# Altium PCB bridge.PcbDoc
Units mil, origin at the board's own origin, x right, y up, seen from the top; angles counter-clockwise.
Board outline 1765 x 1565 mil, 2 copper layers (Top Layer, Bottom Layer); 8 components, 56 nets, 101 pads, 16 vias.
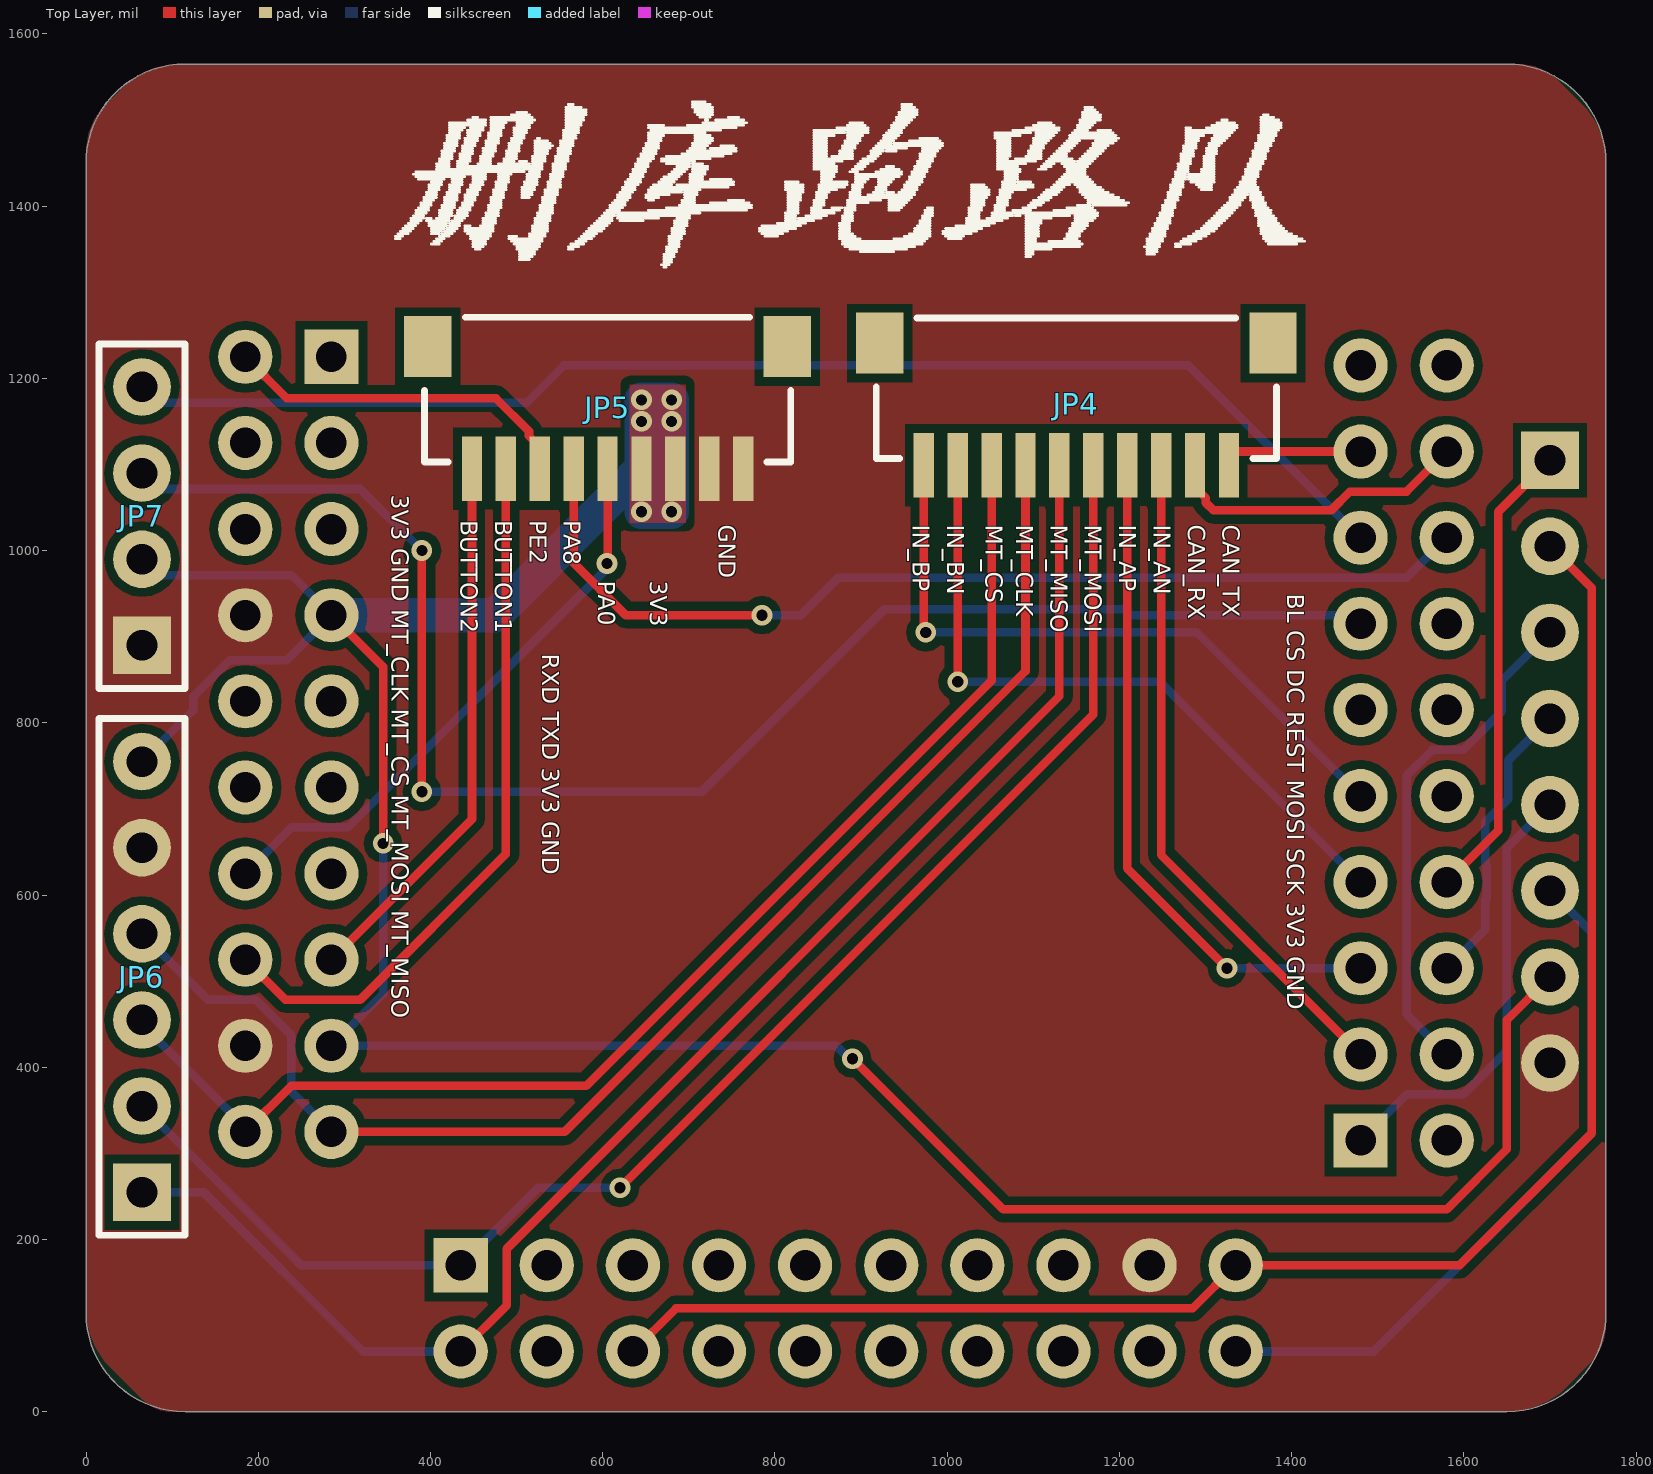
[diagram p0: Top Layer view]
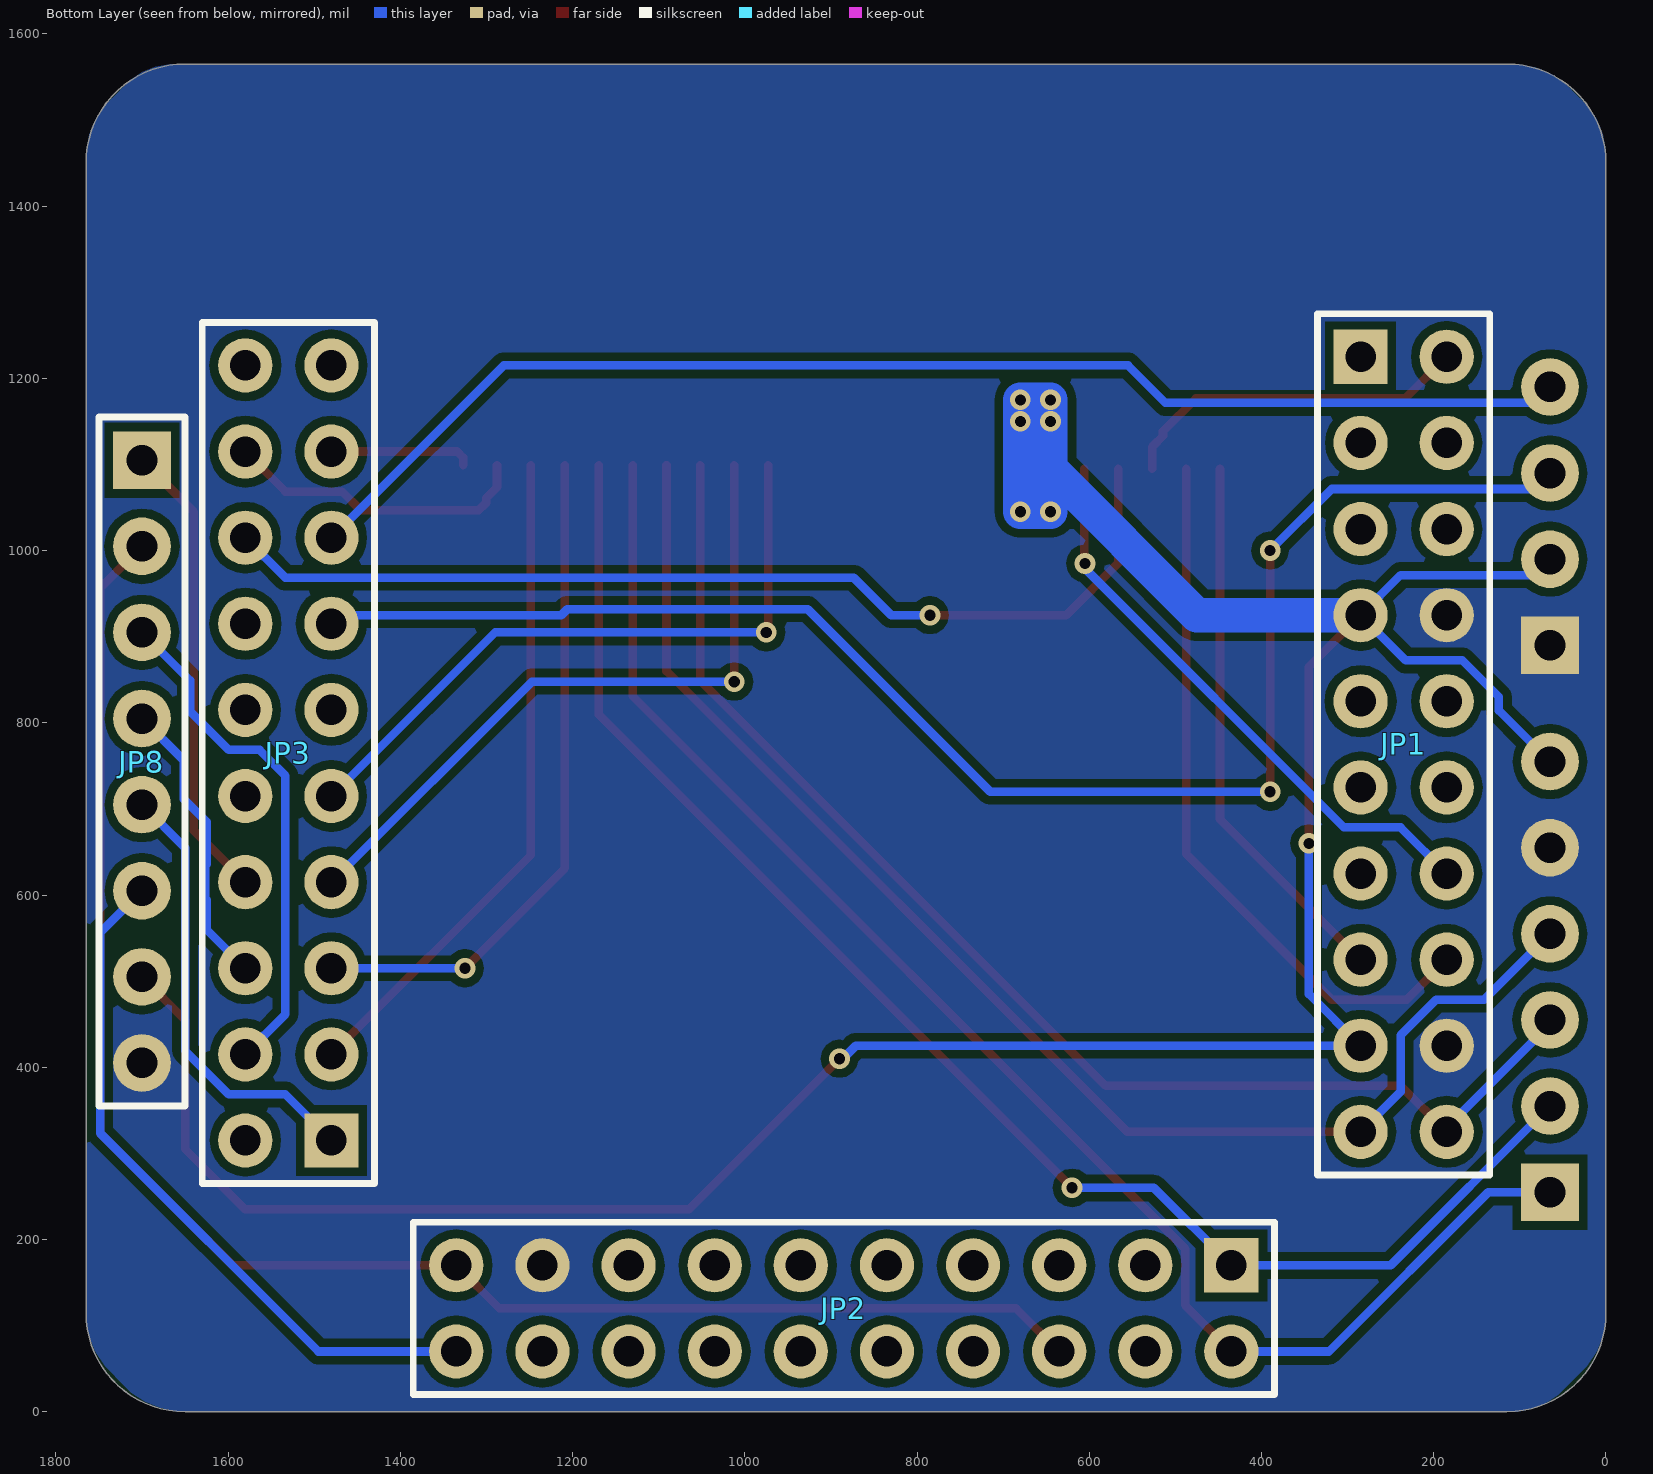
[diagram p1: Bottom Layer view, seen from below]

## Layer stack, top to bottom
Top Solder: solder mask 0.4, Solder Resist, Dk 3.5
Top Layer: signal copper 1.4
Dielectric 1: dielectric 12.6, FR-4, Dk 4.8
Bottom Layer: signal copper 1.4
Bottom Solder: solder mask 0.4, Solder Resist, Dk 3.5

## Board outline
115,0 cw(c115,115) 0,115 0,1450 cw(c115,1450) 115,1565 1650,1565 cw(c1650,1450) 1765,1450 1765,115 cw(c1650,115) 1650,0

## Design rules (kind name [scope] priority, off if disabled: settings)
Clearance [All] p1: gap=10 ignorepadtopadclearanceinfootprint=FALSE except(0: Arc-Hole Track-Hole SMDPad-Hole THPad-Hole Via-Hole Fill-Hole Poly-Hole Region-Hole Text-Hole)
PolygonConnect PolygonConnect_5 [All vs IsNamedPolygon('Bottom Layer-GND')] p1: connectstyle=Direct reliefconductorwidth=10 reliefentries=4 polygonreliefangle="90 Angle" airgapwidth=10
PolygonConnect PolygonConnect_4 [All vs IsNamedPolygon('Top Layer-GND')] p2: connectstyle=Direct reliefconductorwidth=10 reliefentries=4 polygonreliefangle="90 Angle" airgapwidth=10
PolygonConnect PolygonConnect_3 [All vs IsNamedPolygon('Top Layer-GND')] p3: connectstyle=Direct reliefconductorwidth=10 reliefentries=4 polygonreliefangle="90 Angle" airgapwidth=10
PolygonConnect PolygonConnect_2 [All vs IsNamedPolygon('Bottom Layer-3V3')] p4: connectstyle=Direct reliefconductorwidth=10 reliefentries=4 polygonreliefangle="90 Angle" airgapwidth=10
PolygonConnect PolygonConnect_1 [All vs IsNamedPolygon('Top Layer-3V3')] p5: connectstyle=Direct reliefconductorwidth=10 reliefentries=4 polygonreliefangle="90 Angle" airgapwidth=10
PolygonConnect [All] p6: connectstyle=Relief reliefconductorwidth=10 reliefentries=4 polygonreliefangle="90 Angle" airgapwidth=10
RoutingVias [All] p1: holewidth=28 width=50 viastyle="Through Hole" minholewidth=28 minwidth=50 maxholewidth=28 maxwidth=50
SolderMaskExpansion [All] p1: expansion=4
Width [All] p1: maxlimit=100 minlimit=10 preferedwidth=10
30 further rules are at their usual default settings.

## Components (designator, comment, footprint, x,y, rotation, side; value= is the part's Value field where it differs from the comment)
JP1 "Header 2X10" HDR2.54-LI-2x10P 235,775 r270 bottom
JP2 "Header 2X10" HDR2.54-LI-2x10P 885,120 r0 bottom
JP3 "Header 2X10" HDR2.54-LI-2x10P 1530,765 r90 bottom
JP4 "CON-10P" SH1.0-WT-10P 1150,1170 r180 top
JP5 "CON-9P" SH1.0-WT-9P 605.59,1165.9 r180 top
JP6 "HDR-1X6" HDR2.54-LI-6P 65,505 r90 top
JP7 "HDR-1X4" HDR2.54-LI-4P 65,1040 r90 top
JP8 "HDR-1X8" HDR2.54-M-LI-8P 1700,755 r270 bottom

## Footprints (in the part's own frame and the unit in brackets; to place one, negate y for a bottom-side part, rotate by r counter-clockwise, add the part's x,y. Pads: shape width x height; smd on the part's side, far side on the other; paste and mask are expansions set on the pad)
HDR2.54-LI-2x10P [mm] "双排排针，10x2脚"
  rect 1.6x1.6 hole 0.9: 1(-11.43,-1.27)
  round 1.6 hole 0.9: 2(-11.43,1.27) 3(-8.89,-1.27) 4(-8.89,1.27) 5(-6.35,-1.27) 6(-6.35,1.27) 7(-3.81,-1.27) 8(-3.81,1.27) 9(-1.27,-1.27) 10(-1.27,1.27) 11(1.27,-1.27) 12(1.27,1.27) 13(3.81,-1.27) 14(3.81,1.27) 15(6.35,-1.27) 16(6.35,1.27) 17(8.89,-1.27) 18(8.89,1.27) 19(11.43,-1.27) 20(11.43,1.27)
  silkscreen extent -12.7,-2.54 12.7,2.54
HDR2.54-LI-4P [mm] "排针，4脚"
  rect 1.7x1.7 hole 0.9: 1(-3.81,0)
  round 1.7 hole 0.9: 2(-1.27,0) 3(1.27,0) 4(3.81,0)
  silkscreen extent -5.08,-1.27 5.08,1.27
HDR2.54-LI-6P [mm] "排针，6脚                        联系卖家 免费查找封装"
  rect 1.7x1.7 hole 0.9: 1(-6.35,0)
  round 1.7 hole 0.9: 2(-3.81,0) 3(-1.27,0) 4(1.27,0) 5(3.81,0) 6(6.35,0)
  silkscreen extent -7.62,-1.27 7.62,1.27
HDR2.54-M-LI-8P [mm] "排母，8脚"
  rect 1.7x1.7 hole 0.9: 1(-8.89,0)
  round 1.7 hole 0.9: 2(-6.35,0) 3(-3.81,0) 4(-1.27,0) 5(1.27,0) 6(3.81,0) 7(6.35,0) 8(8.89,0)
  silkscreen extent -10.16,-1.27 10.16,1.27
SH1.0-WT-9P [mm] "SH1.0连接器-卧贴-9P                 联系卖家 免费查找封装"
  rect 1.4x1.8 smd: 0(-5.301,-1.799) 0(5.301,-1.801)
  rect 0.6x1.9 smd: 1(3.999,1.801) 2(2.999,1.801) 3(1.999,1.801) 4(0.999,1.801) 5(-0.001,1.801) 6(-1.001,1.801) 7(-2.001,1.801) 8(-3.001,1.801) 9(-4.001,1.801)
  silkscreen extent -5.4,-2.67 5.4,1.6, body extent -5.52,-2.6 5.48,2.35, height 2.9
SH1.0-WT-10P [mm] "SH1.0连接器-卧贴-10P                联系卖家 免费查找封装"
  rect 1.4x1.8 smd: 0(-5.8,-1.8) 0(5.8,-1.8)
  rect 0.6x1.9 smd: 1(4.5,1.8) 2(3.5,1.8) 3(2.5,1.8) 4(1.5,1.8) 5(0.5,1.8) 6(-0.5,1.8) 7(-1.5,1.8) 8(-2.5,1.8) 9(-3.5,1.8) 10(-4.5,1.8)
  silkscreen extent -5.9,-2.54 5.9,1.6, body extent -6,-2.5 6,2.45, height 2.9

## Part data
JP1 JP2 JP3: library part "Header 10X2", "10*2P接插件"
JP4: library part "Header 10", "10P连接器"
JP5: library part "Header 9", "9P连接器"
JP6: library part "Header 6", "6P接插件"
JP7: library part "Header 4", "4P接插件"
JP8: library part "Header 8", "8P接插件"

## Via types
v1: diameter 24, hole 13, Top Layer to Bottom Layer, tented both sides, 16 vias

## Nets (pads, with @x,y where several pads share a name; then routed paths per layer and width w, separated by ;. In a path a pad name is that pad's centre, name@x,y a point inside that pad or via, vN(x,y) a via of type N, cw(c..) or ccw(c..) an arc to the next point about the centre after c; other vN are vias at no path point)
3V3: JP1.7 JP1.17 JP5.6 JP5.7 JP6.6 JP7.2 JP8.7 | length 3578.1
  Top Layer w10: JP1.7 345,865 v1(345,660) ; v1(890,410) 1065,235 1580,235 1650,305 1650,455 JP8.7
  Bottom Layer w10: JP6.6 124.32,814.32 124.32,830.08 166.71,872.47 232.47,872.47 JP1.7 238.5,971.5 JP7.2@66.5,971.5 ; JP7.2@70,970 JP7.2@71.5,971.5 ; v1(345,660) 345,485 JP1.17 871.21,425 886.21,410 v1(890,410)
  Bottom Layer w40: JP1.7 475,925 645,1095 ; 645,1095 v1(645,1150) ; 645,1095 v1(645,1045) v1(680,1045) v1(680,1150) ; v1(645,1150) v1(645,1175) v1(680,1175) v1(680,1150) ; v1(645,1150) v1(680,1150)
BOOT1: JP2.5
BUTTON1: JP1.16 JP5.2 | length 839.3
  Top Layer w10: JP1.16 231.5,478.5 318.5,478.5 487.52,647.52 JP5.2
BUTTON2: JP1.15 JP5.1 | length 637.6
  Top Layer w10: JP1.15 448.15,688.15 JP5.1
CAN_RX: JP3.18 JP4.9 | length 360.4
  Top Layer w10: JP4.9 1287.8,1073.55 1300.35,1060.99 1300.35,1055.52 1309.14,1046.73 1445.98,1046.73 1467.75,1068.5 1533.5,1068.5 JP3.18
CAN_TX: JP3.17 JP4.10 | length 164.7
  Top Layer w10: JP4.10 1327.16,1108.19 1333.98,1115 JP3.17
GND: JP1.8 JP1.18 JP2.17 JP5.8 JP5.9 JP6.5 JP7.1 JP8.8
IN_AM: JP3.3 JP4.8 | length 780.1
  Top Layer w10: JP4.8 1248.43,646.58 JP3.3
IN_AP: JP3.5 JP4.7 | length 787.2
  Top Layer w10: JP4.7 1209.05,630.94 v1(1325,515)
  Bottom Layer w10: v1(1325,515) JP3.5
IN_BM: JP3.7 JP4.2 | length 815.6
  Top Layer w10: v1(1012.2,847.8) JP4.2
  Bottom Layer w10: v1(1012.2,847.8) 1247.2,847.8 JP3.7
IN_BP: JP3.9 JP4.1 | length 778.7
  Top Layer w10: JP4.1 972.84,907.16 v1(975,905)
  Bottom Layer w10: v1(975,905) 1290,905 JP3.9
MT_CLK: JP1.19 JP4.4 JP6.4 | length 1620.4
  Top Layer w10: JP1.19 555.88,325 1090.95,860.07 JP4.4
  Bottom Layer w10: JP6.4 141.5,478.5 197.25,478.5 238.5,437.25 238.5,371.5 JP1.19
MT_CS: JP1.20 JP4.3 JP6.3 | length 1513.5
  Top Layer w10: JP1.20 238.5,378.5 581.1,378.5 1051.57,848.98 JP4.3
  Bottom Layer w10: JP6.3 65,450 185,330 JP1.20
MT_MISO: JP2.2 JP4.5 JP6.1 | length 1763.8
  Top Layer w10: JP2.2 488.5,123.5 488.5,189.26 1130.32,831.07 JP4.5
  Bottom Layer w10: JP6.1 136.72,255 321.72,70 JP2.2
MT_MOSI: JP2.1 JP4.6 JP6.2 | length 1735.7
  Top Layer w10: v1(620,260) 1169.68,809.68 JP4.6
  Bottom Layer w10: JP6.2 250,170 JP2.1 525,260 v1(620,260)
PA0: JP1.14 JP5.5 | length 682.8
  Top Layer w10: v1(605,985) 605.63,985.63 JP5.5
  Bottom Layer w10: JP1.14 238.5,678.5 304.26,678.5 602.32,976.57 602.32,982.32 v1(605,985)
PA1: JP1.13
PA8: JP3.16 JP5.4 | length 1185.6
  Top Layer w10: JP5.4 566.26,985.56 626.82,925 v1(785,925)
  Bottom Layer w10: v1(785,925) 830,925 873.5,968.5 1533.5,968.5 JP3.16
PA9: JP3.13 JP7.3 | length 1820.1
  Top Layer w10: v1(390,720) v1(390,1000)
  Bottom Layer w10: JP7.3@66.5,1071.5 318.5,1071.5 v1(390,1000) ; JP7.3@70,1070 JP7.3@71.5,1071.5 ; v1(390,720) 715,720 927,932 1206.24,932 1213.24,925 1470,925 JP3.13
PA10: JP3.15 JP7.4 | length 1516.5
  Bottom Layer w10: JP7.4@66.5,1171.5 511.5,1171.5 555,1215 1280,1215 JP3.15 ; JP7.4@70,1170 JP7.4@71.5,1171.5
PA14: JP3.19
PA15: JP3.20
PB0: JP2.3
PB10: JP2.15
PB11: JP2.18
PB12: JP2.6 JP2.19 JP8.2 | length 1920.1
  Top Layer w10: JP2.6 685,120 1285,120 JP2.19 1595,170 1748.46,323.46 1748.46,956.54 JP8.2
PB13: JP2.20 JP8.6 | length 820.1
  Bottom Layer w10: JP2.20 1495,70 1748.46,323.46 1748.46,556.54 JP8.6
PB14: JP3.2
PB15: JP3.1 JP8.5 | length 519.6
  Bottom Layer w10: JP3.1 1533.5,368.5 1599.26,368.5 1650,419.24 1650,655 JP8.5
PC0: JP1.10
PC1: JP1.9
PC2: JP1.12
PC3: JP1.11
PC5: JP2.4
PC6: JP3.12
PC7: JP3.11
PC8: JP3.14
PC13: JP1.5
PD8: JP3.4 JP8.3 | length 599.2
  Bottom Layer w10: JP3.4 1533.5,461.5 1533.5,738.5 1563.5,768.5 1599.26,768.5 1644.18,813.43 1644.18,849.18 JP8.3
PD10: JP3.6 JP8.4 | length 340.9
  Bottom Layer w10: JP3.6 1625,560 1625,594.24 1626.5,595.74 1626.5,634.26 1625,635.76 1625,685 1651.54,711.54 1651.54,756.54 JP8.4
PD12: JP3.8 JP8.1 | length 539.7
  Top Layer w10: JP3.8 1640,675 1640,1045 JP8.1
PD14: JP3.10
PE2: JP1.2 JP5.3 | length 413.9
  Top Layer w10: JP1.2 233.26,1176.74 476.21,1176.74 514.33,1138.62 514.33,1133.15 526.89,1120.59 JP5.3
PE3: JP1.1
PE4: JP1.4
PE5: JP1.3
PE6: JP1.6
PE7: JP2.8
PE8: JP2.7
PE9: JP2.10
PE10: JP2.9
PE11: JP2.12
PE12: JP2.11
PE13: JP2.14
PE14: JP2.13
PE15: JP2.16
pads on no net: JP4.0 JP5.0

## Polygon pours and split planes (outlines as drawn)
GND on Top Layer "Top Layer-GND" (solid, pour order 8): 0,121.42 ccw(c100,121.42) 29.29,50.71 65,15 ccw(c101.21,51.21) 101.21,0 1648.58,0 ccw(c1648.58,100) 1719.29,29.29 1745,55 ccw(c1696.72,103.28) 1765,103.28 1765,1448.58 ccw(c1665,1448.58) 1735.71,1519.29 1710,1545 ccw(c1661.72,1496.72) 1661.72,1565 111.42,1565 ccw(c111.42,1465) 40.71,1535.71 25,1520 ccw(c85.36,1459.64) 0,1459.64
3V3 on Top Layer "Top Layer-3V3" (solid, pour order 0): 631.22,1192.6 631.22,1032.6 696.22,1032.6 696.22,1192.6
GND on Bottom Layer "Bottom Layer-GND" (solid, pour order 10): 0,1455 0,116.42 ccw(c100,116.42) 29.29,45.71 50,25 ccw(c110.36,85.36) 110.36,0 1648.58,0 ccw(c1648.58,100) 1719.29,29.29 1735.71,45.71 ccw(c1665,116.42) 1765,116.42 1765,1453.58 ccw(c1665,1453.58) 1735.71,1524.29 1720,1540 ccw(c1659.64,1479.64) 1659.64,1565 111.42,1565 ccw(c111.42,1465) 40.71,1535.71 28.28,1523.28 ccw(c96.57,1455)

## Silkscreen, mask and mechanical layers (free items; w line width, h text height)
Top Overlay:
  drawing of 894 lines, arcs and shapes, not listed
  text "3V3 GND MT_CLK MT_CS MT_MOSI MT_MISO" at 355,1065 h20 r270
  text "BUTTON2" at 435,1035 h20 r270
  text "BUTTON1" at 475,1035 h20 r270
  text "PE2" at 515,1035 h20 r270
  text "PA8" at 555,1035 h20 r270
  text "GND" at 735,1030 h20 r270
  text "IN_BP" at 960,1030 h20 r270
  text "IN_BN" at 1000,1030 h20 r270
  text "MT_CS" at 1045,1030 h20 r270
  text "MT_CLK" at 1080,1030 h20 r270
  text "MT_MISO" at 1120,1030 h20 r270
  text "MT_MOSI" at 1160,1030 h20 r270
  text "IN_AP" at 1200,1030 h20 r270
  text "IN_AN" at 1240,1030 h20 r270
  text "CAN_RX" at 1280,1030 h20 r270
  text "CAN_TX" at 1320,1030 h20 r270
  text "PA0" at 595,965 h20 r270
  text "3V3" at 655,965 h20 r270
  text "BL CS DC REST MOSI SCK 3V3 GND" at 1395,950 h20 r270
  text "RXD TXD 3V3 GND" at 530,880 h20 r270
Mechanical 1:
  lines w10: 0,115 ccw(c115,115) 115,0 1650,0 ccw(c1650,115) 1765,115 1765,1185 1765,1450 ccw(c1650,1450) 1650,1565 115,1565 ccw(c115,1450) 0,1450 0,1185 0,115